# Altium PCB Protone.PcbDoc
Units mil, origin at the board's own origin, x right, y up, seen from the top; angles counter-clockwise.
Board outline 6000 x 4000 mil, 2 copper layers (Top Layer, Bottom Layer); 86 components, 68 nets, 317 pads, 0 vias.
Unrouted connection lines stored in the file: 154.
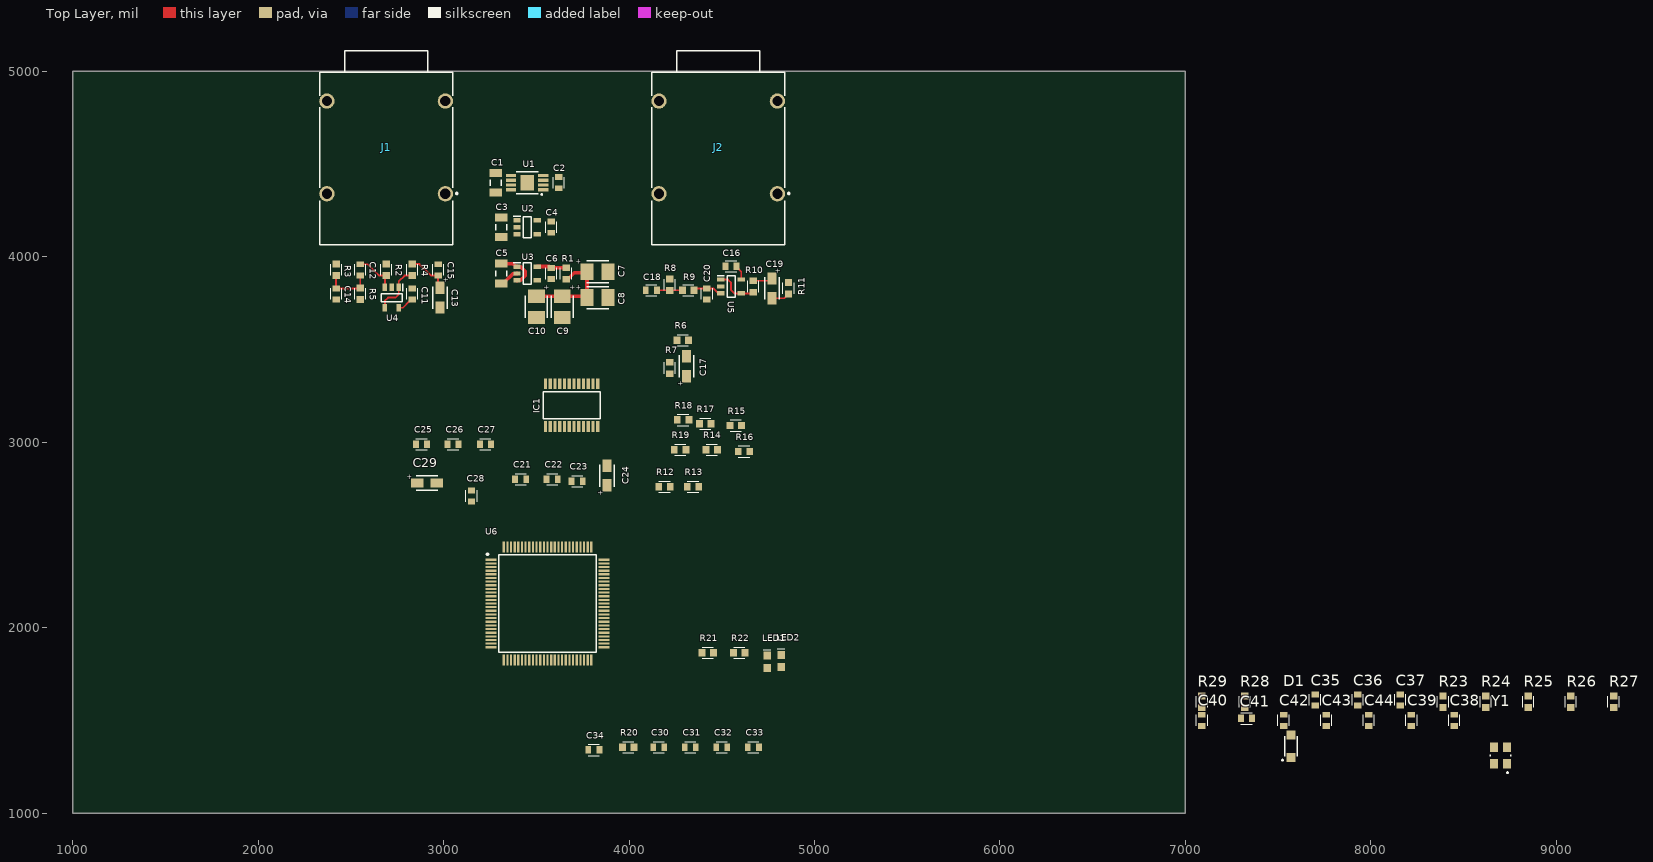
[diagram p0: Top Layer view]
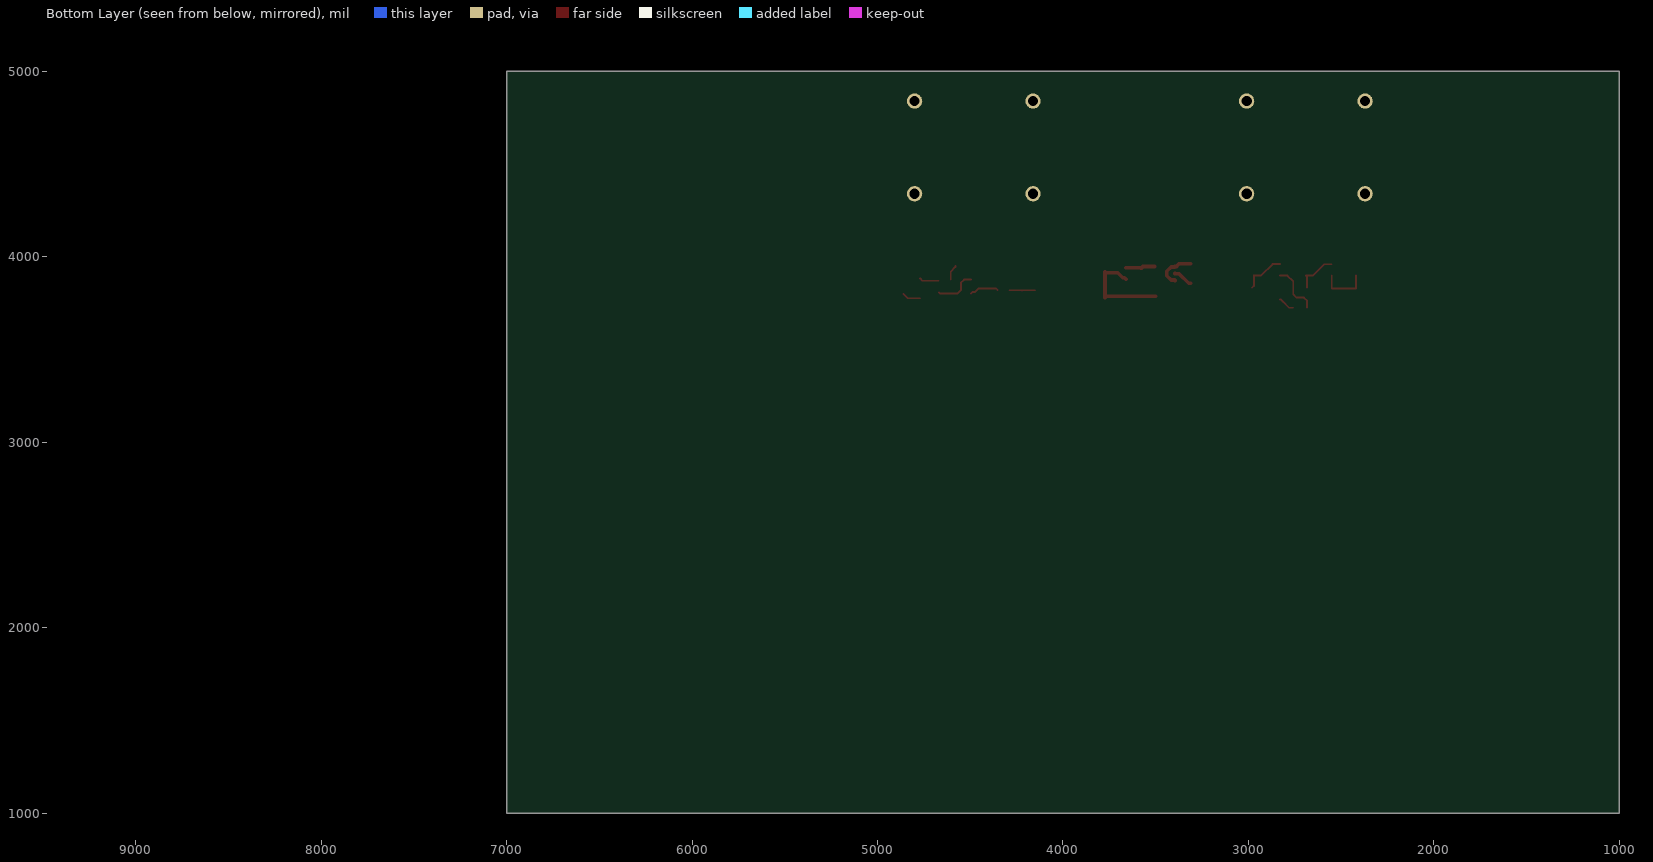
[diagram p1: Bottom Layer view, seen from below]

## Layer stack, top to bottom
Top Solder: solder mask 0.4, Solder Resist, Dk 3.5
Top Layer: signal copper 1.4
Dielectric 1: dielectric 12.6, FR-4, Dk 4.8
Bottom Layer: signal copper 1.4
Bottom Solder: solder mask 0.4, Solder Resist, Dk 3.5

## Board outline
1000,1000 7000,1000 7000,5000 1000,5000

## Design rules (kind name [scope] priority, off if disabled: settings)
Clearance [All] p1: gap=8 ignorepadtopadclearanceinfootprint=TRUE
MinimumSolderMaskSliver [All] p1: minsoldermaskwidth=6
PolygonConnect [All] p1: connectstyle=Relief reliefconductorwidth=10 reliefentries=4 polygonreliefangle="90 Angle" airgapwidth=10
RoutingVias [All] p1: holewidth=28 width=50 viastyle="Through Hole" minholewidth=28 minwidth=50 maxholewidth=28 maxwidth=50
SilkToSilkClearance [All] p1: silktosilkclearance=6
SilkToSolderMaskClearance [IsPad] p1: minsilkscreentomaskgap=6 clearancetoexposedcopper=TRUE
SolderMaskExpansion [All] p1: expansion=2 istentingtop=FALSE
Width [All] p1: maxlimit=20 minlimit=8 preferedwidth=10
27 further rules are at their usual default settings.

## Classes and differential pairs
component class "[1] Power Supply": C1 C2 C3 C4 C5 C6 C7 C8 C9 C10 R1 U1 U2 U3
component class "[4] MCU": C30 C31 C32 C33 C34 C35 C36 C37 C38 C39 C40 C41 C42 C43 C44 D1 LED1 LED2 R20 R21 R22 R23 R24 R25 R26 R27 R28 R29 U6 Y1
component class "[2] Analog Front-End": C11 C12 C13 C14 C15 C16 C17 C18 C19 C20 J1 J2 R2 R3 R4 R5 R6 R7 R8 R9 R10 R11 U4 U5
component class "[3] Audio Codec": C21 C22 C23 C24 C25 C26 C27 C28 C29 IC1 R12 R13 R14 R15 R16 R17 R18 R19

## Components (designator, comment, footprint, x,y, rotation, side; value= is the part's Value field where it differs from the comment)
C1 "2.2uF/50V" C1206 3280,4400 r90 top
C2 "1uF/16V" C0603 3620,4400 r90 top
C3 "2.2uF/50V" C1206 3310,4160 r270 top
C4 "1uF/16V" C0603 3580,4160 r270 top
C5 "2.2uF/50V" C1206 3310,3910 r270 top
C6 "1uF/16V" C0603 3580,3910 r270 top
C7 "47uF/10V" EIA1210 3830,3920 r0 top
C8 "47uF/10V" EIA1210 3830,3780 r0 top
C9 "47uF/10V" EIA1210 3640,3730 r270 top
C10 "47uF/10V" EIA1210 3500,3730 r270 top
C11 "0.1uF/50V C0G" C0603 2830,3800 r90 top
C12 "0.01uF/50V C0G" C0603 2550,3930 r90 top
C13 "10uF/10V" EIA1206 2980,3780 r270 top
C14 "220pF/50V C0G" C0603 2420,3800 r270 top
C15 "220pF/50V C0G" C0603 2970,3930 r90 top
C16 "0.1uF/50V C0G" C0603 4550,3950 r180 top
C17 "47uF/6.3V" EIA1206 4310,3410 r90 top
C18 "0.01uF/50V C0G" C0603 4120,3820 r0 top
C19 "10uF/10V" EIA1206 4770,3830 r270 top
C20 "0.001uF/50V" C0603 4420,3800 r90 top
C21 "2.2nF/50V" C0603 3415,2800 r0 top
C22 "0.1uF/16V" C0603 3585,2800 r0 top
C23 "0.1uF/16V" C0603 3720,2790 r0 top
C24 "47uF/6.3V" EIA1206 3880,2820 r90 top
C25 "2.2nF/50V" C0603 2880,2990 r0 top
C26 "0.1uF/16V" C0603 3050,2990 r0 top
C27 "0.1uF/16V" C0603 3225,2990 r0 top
C28 "0.1uF/16V" C0603 3150,2710 r90 top
C29 "47uF/6.3V" EIA1206 2910,2780 r0 top
C30 "10uF/10V" C0603 4160,1355 r0 top
C31 "10uF/10V" C0603 4330,1355 r0 top
C32 "220pF/50V" C0603 4500,1355 r0 top
C33 "0.1uF/50V" C0603 4670,1355 r0 top
C34 "0.1uF/50V" C0603 3809.88,1340 r0 top
C35 "0.1uF" C0603 7700,1610 r90 top
C36 "2.2uF/10V" C0603 7930,1610 r90 top
C37 "2.2uF/10V" C0603 8160,1610 r90 top
C38 "10pF" C0603 8450,1500 r90 top
C39 "10pF" C0603 8220,1500 r90 top
C40 "0.1uF/50V" C0603 7090,1500 r90 top
C41 "0.1uF/50V" C0603 7330,1510 r0 top
C42 "0.1uF/50V" C0603 7530,1500 r90 top
C43 "2.2uF/10V" C0603 7760,1500 r90 top
C44 "2.2uF/10V" C0603 7990,1500 r90 top
D1 "SMF4L33A" SOD-123FL 7570,1360 r90 top
IC1 "CS4270-CZZR" TSSOP-24 3690,3200 r90 top
J1 "NMJ4HCD2" NMJ4HCD2 2689.49,4995.71 r90 top
J2 "NMJ4HCD2" NMJ4HCD2 4480.51,4995.71 r90 top
LED1 "RED" "LED 0603" 4745,1815 r90 top
LED2 "RED" "LED 0603" 4820,1820 r90 top
R1 "10" R0603 3660,3910 r270 top
R2 "1M" R0603 2690,3930 r90 top
R3 "100" R0603 2420,3930 r270 top
R4 "1K" R0603 2830,3930 r90 top
R5 "1M" R0603 2550,3800 r90 top
R6 "1K" R0603 4290,3550 r0 top
R7 "1K" R0603 4220,3400 r90 top
R8 "1M" R0603 4220,3850 r90 top
R9 "1K" R0603 4320,3820 r0 top
R10 "100" R0603 4670,3840 r90 top
R11 "10K" R0603 4860,3830 r270 top
R12 "2.2K" R0603 4191.1,2760 r0 top
R13 "2.2K" R0603 4345,2760 r0 top
R14 "47" R0603 4445,2960 r0 top
R15 "47K" R0603 4575,3090 r0 top
R16 "10K" R0603 4620,2950 r0 top
R17 "10K" R0603 4410,3100 r0 top
R18 "10K" R0603 4291.1,3120 r0 top
R19 "10K" R0603 4275,2960 r0 top
R20 "10K" R0603 3995,1355 r0 top
R21 "1K" R0603 4425,1865 r0 top
R22 "1K" R0603 4595,1865 r0 top
R23 "10K" R0603 8390,1600 r90 top
R24 "10K" R0603 8620,1600 r90 top
R25 "10K" R0603 8850,1600 r90 top
R26 "10K" R0603 9080,1600 r90 top
R27 "10K" R0603 9310,1600 r90 top
R28 "47" R0603 7320,1600 r90 top
R29 "1M" R0603 7090,1600 r90 top
U1 "TLV76733DGNR" HVSSOP-8 3450,4400 r180 top
U2 "NCP718BSN180T1G" SOT23-5 3450,4160 r0 top
U3 "NCP718BSN500T1G" SOT23-5 3450,3910 r0 top
U4 "TLV9161IDBVR" SOT23-5 2720,3780 r270 top
U5 "TLV9161IDBVR" SOT23-5 4550,3840 r0 top
U6 "STM32H723VGT6" QFP-100 3560,2130 r0 top
Y1 "16MHz 12pF" "XTAL 3.2 x 2.5 mm" 8700,1310 r90 top

## Footprints (in the part's own frame and the unit in brackets; to place one, negate y for a bottom-side part, rotate by r counter-clockwise, add the part's x,y. Pads: shape width x height; smd on the part's side, far side on the other; paste and mask are expansions set on the pad)
C0603 [mm]
  rect 0.8x1.02 smd: 1(-0.759,0) 2(0.759,0)
  silkscreen extent -0.76,-0.76 0.76,0.76, body extent -0.8,-0.4 0.8,0.4, height 0.81
C1206 [mm] "Chip Capacitor, Body 3.2x1.6mm, IPC High Density"
  rect 1.1x1.7 smd: 1(-1.35,0) 2(1.35,0)
  silkscreen extent -0.4,-0.75 0.4,0.75, body extent -1.7,-0.9 1.7,0.9, height 1.3
EIA1206 [mm]
  rect 1.7x1.25 smd: 1(-1.35,0) 2(1.35,0)
  silkscreen extent -1.5,-1 1.5,1, body extent -1.6,-0.8 1.6,0.8, height 1.8
EIA1210 [mm]
  rect 1.8x2.3 smd: 1(-1.45,0) 2(1.45,0)
  silkscreen extent -1.5,-1.5 1.5,1.51, body extent -1.75,-1.43 1.75,1.43, height 2.1
HVSSOP-8 [mm]
  rect 1.4x0.45 smd: 1(-2.2,0.975) 2(-2.2,0.325) 3(-2.2,-0.325) 4(-2.2,-0.975) 5(2.2,-0.975) 6(2.2,-0.325) 7(2.2,0.325) 8(2.2,0.975)
  rect 1.846x2.15 smd: 9(0,0)
  silkscreen extent -2.1,-1.5 1.5,1.7, body extent -2.45,-1.5 2.45,1.5, height 1.1
"LED 0603" [mm]
  rect 1.1x1 smd: 1(-0.85,0) 2(0.85,0)
  silkscreen extent 1.65,-0.51 1.65,0.51, body extent -0.8,-0.4 0.8,0.4, height 0.4
NMJ4HCD2 [mm]
  round 2.1 hole 1.4: 1(-16.655,-8.115) 2(-3.955,-8.115) 3(-3.955,8.115) 4(-16.655,8.115)
  silkscreen extent -23.61,-9.84 2.92,9.1, body extent -23.52,-9.14 8.28,9.06, height 15.95
QFP-100 [mm]
  rect 1.475x0.3 smd: 1(-7.738,6) 2(-7.738,5.5) 3(-7.738,5) 4(-7.738,4.5) 5(-7.738,4) 6(-7.738,3.5) 7(-7.738,3) 8(-7.738,2.5) 9(-7.738,2) 10(-7.738,1.5) 11(-7.738,1) 12(-7.738,0.5) 13(-7.738,0) 14(-7.738,-0.5) 15(-7.738,-1) 16(-7.738,-1.5) 17(-7.738,-2) 18(-7.738,-2.5) 19(-7.738,-3) 20(-7.738,-3.5) 21(-7.738,-4) 22(-7.738,-4.5) 23(-7.738,-5) 24(-7.738,-5.5) 25(-7.738,-6) 51(7.738,-6) 52(7.738,-5.5) 53(7.738,-5) 54(7.738,-4.5) 55(7.738,-4) 56(7.738,-3.5) 57(7.738,-3) 58(7.738,-2.5) 59(7.738,-2) 60(7.738,-1.5) 61(7.738,-1) 62(7.738,-0.5) 63(7.738,0) 64(7.738,0.5) 65(7.738,1) 66(7.738,1.5) 67(7.738,2) 68(7.738,2.5) 69(7.738,3) 70(7.738,3.5) 71(7.738,4) 72(7.738,4.5) 73(7.738,5) 74(7.738,5.5) 75(7.738,6)
  rect 0.3x1.475 smd: 26(-6,-7.738) 27(-5.5,-7.738) 28(-5,-7.738) 29(-4.5,-7.738) 30(-4,-7.738) 31(-3.5,-7.738) 32(-3,-7.738) 33(-2.5,-7.738) 34(-2,-7.738) 35(-1.5,-7.738) 36(-1,-7.738) 37(-0.5,-7.738) 38(0,-7.738) 39(0.5,-7.738) 40(1,-7.738) 41(1.5,-7.738) 42(2,-7.738) 43(2.5,-7.738) 44(3,-7.738) 45(3.5,-7.738) 46(4,-7.738) 47(4.5,-7.738) 48(5,-7.738) 49(5.5,-7.738) 50(6,-7.738) 76(6,7.738) 77(5.5,7.738) 78(5,7.738) 79(4.5,7.738) 80(4,7.738) 81(3.5,7.738) 82(3,7.738) 83(2.5,7.738) 84(2,7.738) 85(1.5,7.738) 86(1,7.738) 87(0.5,7.738) 88(0,7.738) 89(-0.5,7.738) 90(-1,7.738) 91(-1.5,7.738) 92(-2,7.738) 93(-2.5,7.738) 94(-3,7.738) 95(-3.5,7.738) 96(-4,7.738) 97(-4.5,7.738) 98(-5,7.738) 99(-5.5,7.738) 100(-6,7.738)
  silkscreen extent -8.35,-6.65 6.65,6.87, body extent -8,-8 8,8, height 1.6
R0603 [mm]
  rect 0.94x1.02 smd: 1(-0.79,0) 2(0.79,0)
  silkscreen extent -0.76,-0.76 0.76,0.76, body extent -0.8,-0.4 0.8,0.4, height 0.51
SOD-123FL [mm]
  rect 1.2x1.22 smd: A(1.55,0) C(-1.55,0)
  silkscreen extent -2,-0.87 1.35,1.24, body extent -1.83,-0.87 1.83,0.87, height 1.1
SOT23-5 [mm]
  rect 1x0.6 smd: 1(-1.4,0.95) 2(-1.4,0) 3(-1.4,-0.95) 4(1.4,-0.95) 5(1.4,0.95)
  silkscreen extent -1.9,-1.45 0.55,1.5, body extent -1.4,-1.45 1.4,1.45, height 1.2
TSSOP-24 [mm]
  rect 1.475x0.45 smd: 1(-2.938,3.575) 2(-2.938,2.925) 3(-2.938,2.275) 4(-2.938,1.625) 5(-2.938,0.975) 6(-2.938,0.325) 7(-2.938,-0.325) 8(-2.938,-0.975) 9(-2.938,-1.625) 10(-2.938,-2.275) 11(-2.938,-2.925) 12(-2.938,-3.575) 13(2.938,-3.575) 14(2.938,-2.925) 15(2.938,-2.275) 16(2.938,-1.625) 17(2.938,-0.975) 18(2.938,-0.325) 19(2.938,0.325) 20(2.938,0.975) 21(2.938,1.625) 22(2.938,2.275) 23(2.938,2.925) 24(2.938,3.575)
  silkscreen extent -1.85,-3.9 1.85,3.9, body extent -3.2,-3.9 3.2,3.9, height 1.2
"XTAL 3.2 x 2.5 mm" [mm]
  rect 1.3x1.1 smd: 1(-1.15,-0.9) 2(1.15,-0.9) 3(1.15,0.9) 4(-1.15,0.9)
  silkscreen extent -2.45,-1.4 0.13,1.4, body extent -1.6,-1.25 1.6,1.25, height 0.8

## Part data
C1 C3 C5: library part "C1206 2.2uF/50V", "MLCC 2.2uF 50V X7R 10% 1206", Manufacturer=KEMET, Manufacturer Part Number=C1206C225J5RECAUTO, Supplier Part Number 1=80-C1206C225J5RECAUT, Pricing 1="1=0.26000, 10=0.11800, 50=0.11800, 100=0.10100, 1000=0.10100, 10000=0.10100 (USD)", RoHS=Yes, Stock 1=1416, Supplier 1=Mouser
C2 C4 C6: library part "C0603 1uF/16V X5R", "MLCC 1uF 16V X5R 10% SMD 0603 85C Paper T/R", Capacitance=1uF, Case Code (Imperial)=0603, Case Code (Metric)=1608, Dielectric=X5R, Manufacturer=Yageo, Manufacturer Part Number=CC0603KRX5R7BB105, Max Operating Temperature=85°C, Min Operating Temperature=-55°C, Package Quantity=4000, Resistor Type=Ceramic, Supplier Part Number 1=603-CC603KRX5R7BB105, Tolerance=10%, Voltage Rating=16V, Case/Package=0603, Category="Ceramic Capacitors", Construction=Flat, Depth=0.8mm, Dissipation Factor=7%, Halogen Free="Halogen Free", Height=0.8mm, Lead Free="Lead Free", Length=1.6mm, Mount="Surface Mount", Number of Pins=2, Packaging="Tape and Reel", Pricing 1="1=0.17000, 10=0.09100, 50=0.09100, 100=0.04100, 1000=0.03400, 10000=0.02100 (USD)", Radiation Hardening=No, REACH SVHC=Unknown, RoHS=Yes, RoHS Compliant=Yes, Series=CC, Stock 1=726921, Supplier 1=Mouser, Termination=SMD/SMT, Thickness=0.035inch, Voltage Rating (DC)=16V, Width=0.8mm
C7 C8 C9 C10: library part "TANT 47UF/10V", "Tantalum Capacitors - Solid SMD 10V 47uF 10%", Capacitance=47uF, Case Code (Imperial)=1411, Case Code (Metric)=3528, Case/Package=1210, Dielectric Material=Tantalum, ESR (Equivalent Series Resistance)=1R, Leakage Current=4.7uA, Manufacturer="Kyocera AVX", Manufacturer Part Number=TAJB476K010RNJ, Max Operating Temperature=125°C, Min Operating Temperature=-55°C, Package Quantity=2000, Supplier Part Number 1=581-TAJB476K010, Tolerance=10%, Voltage=10V, Category="Tantalum Capacitors", Construction=Flat, Depth=2.8mm, Dissipation Factor=8%, Features="General Purpose", Height=1.9mm, Lead Free="Lead Free", Lead Pitch=1.4mm, Length=3.5mm, Mount="Surface Mount,PCB", Number of Pins=2, Packaging="Tape and Reel", Polarity=Polar, Pricing 1="1=0.46, 10=0.234, 50=0.234, 100=0.201, 1000=0.127, 10000=0.103 (USD)", Radiation Hardening=No, Reach SVHC Compliant=No, RoHS=Yes, RoHS Compliant=Yes, Series=TAJ, Stock 1=71514, Supplier 1=Mouser, Termination=SMD/SMT, Voltage Rating=10V, Voltage Rating (DC)=10V, Width=2.8mm
C11 C16: library part "C0603 0.1uF/50V", "MLCC 0.1uF 50V C0G 10% 0603", Capacitance=100nF, Case Code (Imperial)=0603, Case Code (Metric)=1608, Dielectric=X5R, Dielectric Material=Ceramic, Manufacturer=TDK, Manufacturer Part Number=C1608X5R1H104K080AA, Max Operating Temperature=85°C, Min Operating Temperature=-55°C, Package Quantity=1, Supplier Part Number 1=810-C1608X5R1H104K, Tolerance=10%, Voltage Rating=50V, Case/Package=0603, Category="Ceramic Capacitors", Depth=0.8mm, Height=0.8mm, Lead Free="Lead Free", Length=1.6mm, Mount="Surface Mount", Number of Pins=2, Packaging="Tape and Reel", Pricing 1="1=0.12000, 10=0.04500, 100=0.03700, 500=0.02600, 1000=0.02100, 4000=0.01800 (USD)", Radiation Hardening=No, REACH SVHC="No SVHC", Resistor Type=Ceramic, RoHS=Yes, Stock 1=520600, Supplier 1=Mouser, Supplier 2=Mouser, Supplier Part Number 2=187-CL10B104KB8NNNC, Termination=SMD/SMT, Thickness=0.035inch, Voltage Rating (DC)=50V, Weight=7.1E-05oz, Width=0.031inch
C12 C18: library part "C0603 0.01uF/50V C0G", "MLCC 0.01uF 50V C0G 5% 0603", Capacitance=10nF, Case Code (Imperial)=0603, Case Code (Metric)=1608, Dielectric=C0G, Manufacturer=Murata, Manufacturer Part Number=GRM1885C1H103JA01J, Max Operating Temperature=125°C, Min Operating Temperature=-55°C, Package Quantity=10000, Supplier Part Number 1=81-GRM1885C1H103JA1J, Temperature Coefficient=30ppm/°C, Tolerance=5%, Voltage Rating=50V, Case/Package=0603, Category="Ceramic Capacitors", Height=0.8mm, Length=1.6mm, Material=4241ConductorMaterial, Mount="Surface Mount", Packaging="Tape and Reel", Pricing 1="1=0.13, 10=0.052, 50=0.052, 100=0.03, 1000=0.025, 10000=0.018 (USD)", RoHS=Yes, RoHS Compliant=Yes, Series=GRM, Stock 1=193832, Supplier 1=Mouser, Termination=SMD/SMT, Voltage Rating (DC)=50V, Weight=0.000222oz, Width=0.8mm
C13 C19: library part "TANT 10UF/10V", "Tantalum Capacitors - Solid SMD 10V 10uF 10%", Capacitance=10uF, Case Code (Imperial)=1206, Case Code (Metric)=3216, Dielectric Material=Tantalum, ESR (Equivalent Series Resistance)=4R, Leakage Current=1uA, Manufacturer=KEMET, Manufacturer Part Number=T491A106K010AT, Max Operating Temperature=125°C, Min Operating Temperature=-55°C, Package Quantity=2000, Ripple Current=137mA, Supplier Part Number 1=80-T491A106K010, Tolerance=10%, Voltage=10V, Case/Package=1206, Category="Tantalum Capacitors", Depth=1.6mm, Dissipation Factor=6%, Features="General Purpose", Height=1.6mm, Height - Seated (Max)=0.071inch, Lead Free="Lead Free", Length=3.2mm, Life (Hours)=2000Hour, Mount="Surface Mount,PCB", Packaging="Tape and Reel", Polarity=Polar, REACH SVHC="No SVHC", RoHS=Yes, Stock 1=88800, Supplier 1=Mouser, Supplier 2=LCSC, Supplier Part Number 2=C110052, Termination=SMD/SMT, Voltage Rating=10V, Voltage Rating (DC)=10V, Width=0.063inch
C14 C15: library part "C0603 220pF/50V C0G", "MLCC 220pF 50V C0G 5% 0603", Capacitance=220pF, Case Code (Imperial)=0603, Case Code (Metric)=1608, Dielectric=C0G, Dielectric Material=Ceramic, Manufacturer=KEMET, Manufacturer Part Number=C0603C221J5GACTU, Max Operating Temperature=125°C, Min Operating Temperature=-55°C, Package Quantity=1, Supplier Part Number 1=80-C0603C221J5G, Temperature Coefficient=30ppm/°C, Tolerance=5%, Voltage=50V, Case/Package=0603, Category="Ceramic Capacitors", Construction=Flat, Depth=0.8mm, Dissipation Factor=0.1%, Height=0.8mm, Lead Free="Lead Free", Lead Pitch=0.7mm, Length=1.6mm, Material=4241ConductorMaterial, Mount="Surface Mount", Number of Pins=2, Packaging="Tape and Reel", Pricing 1="1=0.1, 10=0.027, 50=0.027, 100=0.016, 1000=0.011, 10000=0.007 (USD)", Radiation Hardening=No, Reach SVHC Compliant=No, RoHS=Yes, RoHS Compliant=Yes, Series=C, Stock 1=174318, Supplier 1=Mouser, Termination=SMD/SMT, Thickness=0.034inch, Voltage Rating=50V, Voltage Rating (AC)=50V, Voltage Rating (DC)=50V, Width=0.8mm
C17 C24 C29: library part "TANT 47UF/6.3V", "Tantalum Capacitors - Solid SMD 6.3V 47uF 10%", Capacitance=47uF, Case/Package=Radial, Manufacturer="Kyocera AVX", Manufacturer Part Number=TAJA476K006SNJV, Supplier Part Number 1=581-TAJA476K006SNJV, Tolerance=10%, Voltage Rating (DC)=6.3V, Category="Tantalum Capacitors", Lead Free="Lead Free", Pricing 1="1=0,57000, 10=0,39900, 50=0,39900, 100=0,20200, 1000=0,15200, 10000=0,12500 (USD)", RoHS=Yes, RoHS Compliant=Yes, Stock 1=97469, Supplier 1=Mouser
C20: library part "C0603 0.001uF/50V", "MLCC 0.001uF 50V X5R 10% 0603", Capacitance=1nF, Case/Package=0603, Dielectric=X7R, Manufacturer=Samsung, Manufacturer Part Number=CL10B102KB8NNNL, Max Operating Temperature=125°C, Min Operating Temperature=-55°C, Package Quantity=15000, Supplier Part Number 1=187-CL10B102KB8NNNL, Tolerance=10%, Voltage Rating=50V, Category="Ceramic Capacitors", Construction=Flat, Depth=0.8mm, Height=0.8mm, Lead Free="Lead Free", Length=1.6mm, Mount="Surface Mount", Packaging="Tape and Reel", Pricing 1="1=0.10000, 10=0.03500, 50=0.03500, 100=0.01600, 1000=0.00900, 10000=0.00600 (USD)", Radiation Hardening=No, RoHS=Yes, RoHS Compliant=Yes, Series=CL, Stock 1=55616, Supplier 1=Mouser, Thickness=0.035inch, Voltage Rating (DC)=50V, Width=0.031inch
C21 C25: library part "C0603 2.2nF/50V", "MLCC 2.2nF 10V X5R 10% 0603", Capacitance=2.2nF, Case Code (Imperial)=0603, Case Code (Metric)=1608, Dielectric=X7R, Manufacturer=Samsung, Manufacturer Part Number=CL10B222KB8NFNC, Max Operating Temperature=125°C, Min Operating Temperature=-55°C, Package Quantity=1, Supplier Part Number 1=187-CL10B222KB8NFNC, Tolerance=10%, Voltage Rating=50V, Case/Package=0603, Category="Ceramic Capacitors", Construction=Flat, Depth=0.8mm, Height=0.8mm, Length=0.063inch, Mount="Surface Mount", Packaging="Tape and Reel", Pricing 1="1=0.10000, 10=0.03800, 50=0.03800, 100=0.01700, 1000=0.00900, 10000=0.00600 (USD)", Radiation Hardening=No, RoHS=Yes, RoHS Compliant=Yes, Series=CL, Stock 1=114857, Supplier 1=Mouser, Thickness=0.035inch, Width=0.031inch
C22 C23 C26 C27 C28: library part "C0603 0.1uF/16V", "MLCC 0.1UF, 16V, X5R, 10%, 0603.", Capacitance=100nF, Case Code (Imperial)=0603, Case Code (Metric)=1608, Dielectric=X5R, Manufacturer="Kyocera AVX", Manufacturer Part Number=0603YD104KAT2A, Max Operating Temperature=85°C, Min Operating Temperature=-55°C, Package Quantity=4000, Supplier Part Number 1=581-0603YD104KAT2A, Tolerance=10%, Voltage Rating=16V, Case/Package=0603, Category="Ceramic Capacitors", ComponentLink1Description=https://datasheet.ciiva.com/11504/cx5r-11504040.pdf?src-supplier=Avnet, ComponentLink1URL=https://datasheet.ciiva.com/11504/cx5r-11504040.pdf?src-supplier=Avnet, ComponentLink2Description=https://datasheet.ciiva.com/208/cx5r-208121.pdf?src-supplier=Digi-Key, ComponentLink2URL=https://datasheet.ciiva.com/208/cx5r-208121.pdf?src-supplier=Digi-Key, Depth=0.81mm, Height=0.9mm, Lead Free="Lead Free", Length=1.6mm, Mount="Surface Mount", Number of Pins=2, Packaging="Tape and Reel", Pricing 1="1=0.26000, 10=0.11400, 50=0.11400, 100=0.09700, 1000=0.05900, 10000=0.04800 (USD)", RoHS=Yes, Stock 1=3315, Supplier 1=Mouser, Termination=SMD/SMT, Thickness=0.035inch, Voltage Rating (DC)=16V, Width=0.81mm
C30 C31: library part "C0603 10uF/10V", "MLCC 10uF 10V X5R 20% 0603", Capacitance=10uF, Case Code (Imperial)=0603, Case Code (Metric)=1608, Manufacturer=KEMET, Manufacturer Part Number=C0603C106M8PAC7867, Max Operating Temperature=85°C, Min Operating Temperature=-55°C, Supplier Part Number 1=80-C0603C106M8PACTU, Tolerance=20%, Voltage Rating=10V, Case/Package=0603, Category="Ceramic Capacitors", Mount="Surface Mount", Packaging="Cut Tape", Pricing 1="1=0.46000, 10=0.24500, 50=0.24500, 100=0.21300, 1000=0.13400, 10000=0.10600 (USD)", RoHS=Yes, RoHS Compliant=Yes, Stock 1=19357, Supplier 1=Mouser, Supplier 2=Digi-Key, Supplier Part Number 2=399-14945-6-ND
C32: library part "C0603 220pF/50V", "MLCC 220pF 50V X7R 10% 0603", Capacitance=220pF, Case/Package=0603, Dielectric=X7R, Dielectric Material=Ceramic, Manufacturer=KEMET, Manufacturer Part Number=C0603C221K5RACTU, Max Operating Temperature=125°C, Min Operating Temperature=-55°C, Supplier Part Number 1=80-C0603C221K5R, Tolerance=10%, Voltage=50V, Category="Ceramic Capacitors", Depth=0.8mm, Height=0.8mm, Length=1.6mm, Mount="Surface Mount", Packaging="Tape and Reel", Pricing 1="1=0.10000, 10=0.03100, 100=0.02100, 500=0.01800, 1000=0.01400, 4000=0.01100 (USD)", Radiation Hardening=No, RoHS=Yes, Stock 1=91306, Supplier 1=Mouser, Termination=SMD/SMT, Voltage Rating (DC)=50V
C33 C34 C35 C40 C41 C42: library part "C0603 0.1uF/50V", "MLCC 0.1uF 50V X5R 10% 0603", Capacitance=100nF, Case Code (Imperial)=0603, Case Code (Metric)=1608, Dielectric=X5R, Dielectric Material=Ceramic, Manufacturer=TDK, Manufacturer Part Number=C1608X5R1H104K080AA, Max Operating Temperature=85°C, Min Operating Temperature=-55°C, Package Quantity=1, Supplier Part Number 1=810-C1608X5R1H104K, Tolerance=10%, Voltage Rating=50V, Case/Package=0603, Category="Ceramic Capacitors", Depth=0.8mm, Height=0.8mm, Lead Free="Lead Free", Length=1.6mm, Mount="Surface Mount", Number of Pins=2, Packaging="Tape and Reel", Pricing 1="1=0.12000, 10=0.04500, 100=0.03700, 500=0.02600, 1000=0.02100, 4000=0.01800 (USD)", Radiation Hardening=No, REACH SVHC="No SVHC", Resistor Type=Ceramic, RoHS=Yes, Stock 1=520600, Supplier 1=Mouser, Supplier 2=Mouser, Supplier Part Number 2=187-CL10B104KB8NNNC, Termination=SMD/SMT, Thickness=0.035inch, Voltage Rating (DC)=50V, Weight=7.1E-05oz, Width=0.031inch
C36 C37 C43 C44: library part "C0603 2.2uF/10V", "MLCC 2.2uF 10V X5R 10% 0603", Capacitance=2.2uF, Case Code (Imperial)=0603, Case Code (Metric)=1608, Dielectric=X5R, Manufacturer=Samsung, Manufacturer Part Number=CL10A225KP8NNNC, Max Operating Temperature=85°C, Min Operating Temperature=-55°C, Package Quantity=1, Supplier Part Number 1=187-CL10A225KP8NNNC, Tolerance=10%, Voltage=10V, Case/Package=0603, Category="Ceramic Capacitors", Depth=0.8mm, Height=0.8mm, Lead Free="Lead Free", Length=1.6mm, Material=Ceramic, Mount="Surface Mount", Packaging="Tape and Reel", Pricing 1="1=0.10000, 10=0.06100, 100=0.02700, 500=0.01900, 1000=0.01500, 2500=0.01100 (USD)", Radiation Hardening=No, RoHS=Yes, Stock 1=763370, Supplier 1=Mouser, Thickness=0.035inch, Voltage Rating=10V, Voltage Rating (DC)=10V, Width=0.031inch
C38 C39: library part "C0603 10pF/50V", "MLCC 10pF 50V X7R 10% 0603", Case/Package=0603, Dielectric=X7R, Dielectric Material=Ceramic, Manufacturer=KEMET, Manufacturer Part Number=C0603C100K5RACTU, Supplier Part Number 1=80-C0603C100K5R, Tolerance=10%, Voltage Rating (DC)=50V, Capacitance=10pF, Category="Ceramic Capacitors", Pricing 1="1=0.24000, 10=0.11000, 50=0.11000, 100=0.09400, 1000=0.05800, 10000=0.04100 (USD)", RoHS=No, Stock 1=10694, Supplier 1=Mouser, Supplier 2=Mouser, Supplier Part Number 2=581-06035C100KAT2A
D1: library part "ESD Diode SMF4L33A", "TVS DIODE, 2KW, 33V, UNIDIR, SOD-123FL", Clamping Voltage=53.3V, Manufacturer=Littelfuse, Max Operating Temperature=150°C, Min Breakdown Voltage=36.7V, Min Operating Temperature=-55°C, Peak Pulse Current=7.5A, Peak Pulse Power=400W, Power Line Protection=No, Resistor Type=Zener, Reverse Standoff Voltage=33V, Supplier Part Number 1=576-SMF4L33A, Category="TVS Diodes", Manufacturer Part Number=SMF4L33A, Mount="Surface Mount", Number of Unidirectional Channels=1, Packaging="Tape and Reel", Pricing 1="1=0,46000, 10=0,30000, 50=0,30000, 100=0,16700, 1000=0,12500, 10000=0,10100 (USD)", RoHS=Yes, RoHS Compliant=Yes, Stock 1=5344, Supplier 1=Mouser
IC1: "Audio Codec 2ADC / 2DAC 24-Bit 24-Pin TSSOP T/R (Alt: CS4270-CZZR)", Case/Package=TSSOP, Manufacturer="Cirrus Logic", Max Operating Temperature=70°C, Min Operating Temperature=-10°C, Package Quantity=4000, Supplier Part Number 1=777-CS4270-CZZR, Category=CODECs, Contact Plating=Tin,Matte, Interface=I2C,SPI,Serial, Manufacturer Part Number=CS4270-CZZR, Mount="Surface Mount", Number Of A/D Converters=2, Number of D/A Converters=2, Number of Pins=24, Packaging="Tape and Reel", Pricing 1="1=7.04, 10=6.36, 50=6.06, 100=5.27, 1000=4.4, 10000=4.4 (USD)", Resolution=24b, RoHS=Yes, RoHS Compliant=Yes, Sampling Rate=216KS/s, Series=-, Stock 1=20885, Supplier 1=Mouser
J1 J2: library part "TS Audio Jack 6.3mm", "Phone Connectors 2C MONO 2-SPST NC", Color=Black, Manufacturer=Neutrik, Max Current Rating=3A, Max Operating Temperature=70°C, Min Operating Temperature=-25°C, Package Quantity=200, Supplier Part Number 1=550-12202, Voltage Rating=50V, Category="Audio / Video Connectors", ComponentLink1Description=https://datasheet.ciiva.com/16148/210-199761-16148179.pdf?src-supplier=Onlinecomponents.com, ComponentLink1URL=https://datasheet.ciiva.com/16148/210-199761-16148179.pdf?src-supplier=Onlinecomponents.com, Contact Material=Brass, Contact Plating=Silver, Gender=Female, Housing Material=Polyamide, Manufacturer Part Number=NMJ4HCD2, Mount="Through Hole", Number of Contacts=2, Number of Pins=4, Number of Ports=1, Number of Terminals/Pins=4, Orientation=Horizontal, Pricing 1="1=1,51000, 10=1,39000, 50=1,36000, 100=1,18000, 1000=1,11000, 10000=1,10000 (USD)", RoHS=Yes, RoHS Compliant=Yes, Series=M, Stock 1=39770, Supplier 1=Mouser, Termination="Through Hole", Weight=0.246918oz
LED1 LED2: library part "LED 0603 RED", "Red 625nm LED Indication - Discrete 2V 0603", Case Code (Imperial)=0603, Case Code (Metric)=1608, Color=Red, Forward Voltage=2V, Manufacturer="Wurth Electronics", Manufacturer Part Number=150060RS55040, Supplier Part Number 1=710-150060RS55040, Test Current=20mA, Case/Package=0603, Category=LEDs, Dominant Wavelength=624nm, Height=0.5mm, Length=1.6mm, Lens Size=0.8mm, Lens Style=Flat, Lens Transparency=Diffused, Luminous Intensity=90mcd, Mount="Surface Mount", Packaging="Tape and Reel", Pricing 1="1=0.18000, 10=0.16200, 100=0.14700, 500=0.13200, 1000=0.11700, 2000=0.11700 (USD)", RoHS=No, Stock 1=8586, Supplier 1=Mouser, Viewing Angle=140°, Width=0.8mm
R1: library part "R0603 10", "RES 0603 10 OHM 0.5% 1/10W", Case Code (Imperial)=0603, Case Code (Metric)=1608, Manufacturer=Yageo, Manufacturer Part Number=RT0603DRE0710RL, Max Power Dissipation=100mW, Resistance=10R, Resistor Type="Thin Film", Supplier Part Number 1=603-RT0603DRE0710RL, Tolerance=0.5%, Voltage Rating (DC)=50V, Case/Package=0603, Category="Chip SMD Resistors", Number of Terminations=2, RoHS=Yes, Supplier 1=Mouser
R2 R5 R8 R29: library part "R0603 1M", "RES SMD 1M OHM 1% 1/10W 0603", Case Code (Imperial)=0603, Case Code (Metric)=1608, Manufacturer=Yageo, Manufacturer Part Number=RC0603FR-071ML, Max Operating Temperature=155°C, Min Operating Temperature=-55°C, Package Quantity=5000, Power Rating=100mW, Resistance=1MR, Resistor Type="Thick Film", Supplier Part Number 1=603-RC0603FR-071ML, Temperature Coefficient=100ppm/°C, Tolerance=1%, Voltage Rating=75V, Voltage Rating (DC)=50V, Application(s)="HIGH RELIABILITY", Case/Package=0603, Category="Chip SMD Resistors", Depth=0.8mm, Height=0.45mm, Lead Free="Lead Free", Length=1.6mm, Military Standard=Not, Number of Pins=2, Packaging="Cut Tape", Pricing 1="1=0.10000, 10=0.01800, 50=0.01800, 100=0.00700, 1000=0.00400, 10000=0.00200 (USD)", REACH SVHC="No SVHC", RoHS=Yes, RoHS Compliant=Yes, Series=RC, Stock 1=1321822, Supplier 1=Mouser, Technology="THICK FILM", Termination=SMD/SMT, Type="General Purpose", Weight=0.000847oz, Width=0.8mm
R3 R10: library part "R0603 100", "RES 0603 100 OHM 1% 1/10W", Case Code (Imperial)=0603, Case Code (Metric)=1608, Manufacturer=Yageo, Manufacturer Part Number=RC0603FR-07100RL, Max Operating Temperature=155°C, Max Power Dissipation=100mW, Min Operating Temperature=-55°C, Resistance=100R, Resistor Type="Thick Film", Supplier Part Number 1=603-RC0603FR-07100RL, Temperature Coefficient=100ppm/°C, Tolerance=1%, Voltage Rating=50V, Case/Package=0603, Category="Chip SMD Resistors", Construction=Rectangular, Contact Plating=Tin,Matte, Depth=0.8mm, Features="Moisture Resistant,Automotive AEC-Q200", Height=0.022inch, Lead Free="Lead Free", Length=1.6mm, Military Standard=Not, Number of Terminations=2, Packaging="Tape and Reel", Power Rating=100mW, Pricing 1="1=0.10000, 10=0.02200, 50=0.02200, 100=0.00800, 1000=0.00600, 10000=0.00400 (USD)", Radiation Hardening=No, RoHS=Yes, RoHS Compliant=Yes, Series=AC, Size Code=0603, Stock 1=62434, Supplier 1=Mouser, Termination=SMD/SMT, Weight=7.1E-05oz, Width=0.031inch
R4 R6 R7 R9: library part "R0603 1K", "Res Thick Film 0603 1K Ohm 1% 1/10W ±50ppm/°C Molded SMD Paper T/R", Case/Package=0603, Manufacturer=Yageo, Manufacturer Part Number=RE0603FRE071KL, Max Operating Temperature=155°C, Max Power Dissipation=100mW, Min Operating Temperature=-55°C, Resistance=1kR, Resistor Type="Thick Film", Supplier Part Number 1=603-RE0603FRE071KL, Temperature Coefficient=50ppm/°C, Tolerance=1%, Category="Chip SMD Resistors", ComponentLink1Description=http://www.yageo.com/NewPortal/yageodocoutput?fileName=/pdf/R-Chip/PYu-RE_105_RoHS_L_4.pdf&src-supplier=Digi-Key, ComponentLink1URL=http://www.yageo.com/NewPortal/yageodocoutput?fileName=/pdf/R-Chip/PYu-RE_105_RoHS_L_4.pdf&src-supplier=Digi-Key, Features="Moisture Resistant", Height=0.022inch, Length=0.063inch, Number of Terminations=2, Packaging="Tape and Reel", Pricing 1="1=0.11000, 10=0.03800, 50=0.03800, 100=0.01700, 1000=0.00800, 10000=0.00500 (USD)", RoHS=Yes, RoHS Compliant=Yes, Stock 1=21464, Supplier 1=Mouser, Width=0.032inch
R11 R16 R17 R18 R19: library part "R0603 10K", "RES 0603 10K OHM 1% 1/10W", Case Code (Imperial)=0603, Case Code (Metric)=1608, Manufacturer=Yageo, Manufacturer Part Number=RC0603FR-0710KP, Max Operating Temperature=155°C, Max Power Dissipation=100mW, Min Operating Temperature=-55°C, Resistance=10kR, Resistor Type="Thick Film", Supplier Part Number 1=603-RC0603FR-0710KP, Temperature Coefficient=150ppm/°C, Tolerance=1%, Case/Package=0603, Category="Chip SMD Resistors", Features="Moisture Resistant", Height=0.022inch, Length=0.063inch, Number of Terminations=2, Packaging="Tape and Reel", Pricing 1="1=0.18000, 10=0.04200, 50=0.04200, 100=0.01400, 1000=0.01000, 10000=0.00600 (USD)", RoHS=Yes, RoHS Compliant=Yes, Stock 1=6316, Supplier 1=Mouser, Width=0.031inch
R12 R13: library part "R0603 2.2K", "RES 0603 2.2K OHM 1% 1/10W", Case Code (Imperial)=0603, Case Code (Metric)=1608, Manufacturer=Yageo, Manufacturer Part Number=RC0603FR-072K2L, Max Operating Temperature=155°C, Max Power Dissipation=100mW, Min Operating Temperature=-55°C, Package Quantity=1, Resistance=2.2kR, Resistance Tolerance=1%, Resistor Type="Thick Film", Supplier Part Number 1=603-RC0603FR-072K2L, Temperature Coefficient=100ppm/°C, Voltage Rating=50V, Case/Package=0603, Category="Chip SMD Resistors", Construction=Rectangular, Depth=0.8mm, Features="Moisture Resistant", Height=0.022inch, Lead Free="Lead Free", Length=1.6mm, Military Standard=Not, Number of Terminations=2, Packaging="Tape and Reel", Power Rating=100mW, Pricing 1="1=0.100000, 10=0.018000, 50=0.018000, 100=0.006000, 1000=0.005000, 10000=0.003000 (USD)", REACH SVHC="No SVHC", RoHS=Yes, RoHS Compliant=Yes, Series=RC, Size Code=0603, Stock 1=372094, Supplier 1=Mouser, Termination=SMD/SMT, Tolerance=1%, Width=0.031inch
R14 R28: library part "R0603 47", "RES 0603 47 1% 1/10W", Case Code (Imperial)=0603, Case Code (Metric)=1608, Manufacturer=Yageo, Manufacturer Part Number=RC0603FR-0747RL, Max Operating Temperature=155°C, Max Power Dissipation=100mW, Min Operating Temperature=-55°C, Package Quantity=1, Resistance=47R, Resistor Type="Thick Film", Supplier Part Number 1=603-RC0603FR-0747RL, Temperature Coefficient=100ppm/°C, Tolerance=1%, Voltage Rating=75V, Voltage Rating (DC)=50V, Case/Package=0603, Category="Chip SMD Resistors", Depth=0.8mm, Features="Moisture Resistant", Height=0.45mm, Lead Free="Lead Free", Length=1.6mm, Military Standard=Not, Number of Pins=2, Number of Terminations=2, Packaging="Tape and Reel", Power Rating=100mW, REACH SVHC=Unknown, RoHS=Yes, Stock 1=267107, Supplier 1=Mouser, Termination=SMD/SMT, Weight=7.1E-05oz, Width=0.8mm
R15: library part "R0603 47K", "RES 0603 47K 1% 1/10W", Case Code (Imperial)=0603, Case Code (Metric)=1608, Manufacturer=Yageo, Manufacturer Part Number=RC0603FR-0747KL, Max Operating Temperature=155°C, Max Power Dissipation=100mW, Min Operating Temperature=-55°C, Package Quantity=1, Resistance=47kR, Resistance Tolerance=1%, Resistor Type="Thick Film", Supplier Part Number 1=603-RC0603FR-0747KL, Temperature Coefficient=100ppm/°C, Voltage Rating=50V, Case/Package=0603, Category="Chip SMD Resistors", Construction=Rectangular, Depth=0.8mm, Features="Moisture Resistant", Height=0.022inch, Lead Free="Lead Free", Length=1.6mm, Military Standard=Not, Number of Pins=2, Number of Terminations=2, Packaging="Tape and Reel", Power Rating=100mW, Pricing 1="1=0.10000, 10=0.02400, 50=0.02400, 100=0.01000, 1000=0.00400, 10000=0.00200 (USD)", REACH SVHC=Unknown, RoHS=Yes, RoHS Compliant=Yes, Series=RC, Size Code=0603, Stock 1=158656, Supplier 1=Mouser, Technology="THICK FILM", Termination=SMD/SMT, Tolerance=1%, Voltage Rating (DC)=50V, Width=0.031inch
R20 R23 R24 R25 R26 R27: library part "R0603 10K", "RES 0603 10K OHM 1% 1/10W", Case Code (Imperial)=0603, Case Code (Metric)=1608, Manufacturer=Yageo, Manufacturer Part Number=RC0603FR-1310KL, Max Operating Temperature=155°C, Min Operating Temperature=-55°C, Power Rating=100mW, Resistance=10kR, Resistance Tolerance=1%, Resistor Type="Thick Film", Supplier Part Number 1=603-RC0603FR-1310KL, Temperature Coefficient=100ppm/°C, Voltage Rating=50V, Case/Package=0603, Category="Chip SMD Resistors", ComponentLink1Description=https://datasheet.ciiva.com/7983/443971-7983673.pdf?src-supplier=Element14, ComponentLink1URL=https://datasheet.ciiva.com/7983/443971-7983673.pdf?src-supplier=Element14, ComponentLink2Description=https://datasheet.ciiva.com/16850/pyu-rc0603-51-rohs-l-4-16850349.pdf?src-supplier=Future+Electronics, ComponentLink2URL=https://datasheet.ciiva.com/16850/pyu-rc0603-51-rohs-l-4-16850349.pdf?src-supplier=Future+Electronics, Construction=Rectangular, Depth=0.8mm, Lead Free="Lead Free", Length=1.6mm, Military Standard=Not, Number of Pins=2, Packaging="Tape and Reel", Pricing 1="1=0.10000, 10=0.01800, 50=0.01800, 100=0.00600, 1000=0.00500, 2500=0.00400, 10000=0.00400 (USD)", REACH SVHC="No SVHC", RoHS=Yes, RoHS Compliant=Yes, Series=RC, Size Code=0603, Stock 1=50990, Supplier 1=Mouser, Termination=SMD/SMT, Tolerance=1%, Voltage Rating (DC)=50V
R21 R22: library part "R0603 1K", "RES 0603 1K OHM 1% 1/10W", Case Code (Imperial)=0603, Case Code (Metric)=1608, Manufacturer=Yageo, Manufacturer Part Number=RC0603FR-071KL, Max Operating Temperature=155°C, Max Power Dissipation=100mW, Min Operating Temperature=-55°C, Resistance=1kR, Resistance Tolerance=1%, Resistor Type="Thick Film", Supplier Part Number 1=603-RC0603FR-071KL, Temperature Coefficient=100ppm/°C, Voltage Rating=50V, Case/Package=0603, Category="Chip SMD Resistors", Construction=Rectangular, Contact Plating=Tin,Matte, Depth=0.8mm, Features="Moisture Resistant", Height=0.45mm, Lead Free="Lead Free", Length=1.6mm, Military Standard=Not, Number of Terminations=2, Packaging="Tape and Reel", Power Rating=100mW, Pricing 1="1=0.10000, 10=0.02100, 50=0.02100, 100=0.00700, 1000=0.00400, 10000=0.00200 (USD)", Radiation Hardening=No, REACH SVHC="No SVHC", RoHS=Yes, RoHS Compliant=Yes, Series=RC, Size Code=0603, Stock 1=1697496, Supplier 1=Mouser, Technology="THICK FILM", Termination=SMD/SMT, Tolerance=1%
U1: "Fixed-output, 1-A, 16-V, positive-voltage low-dropout (LDO) linear regulator 8-HVSSOP -40 to 125", Manufacturer="Texas Instruments", Supplier Part Number 1=595-TLV76733DGNR, Category="Integrated Circuits (ICs)", Manufacturer Part Number=TLV76733DGNR, Pricing 1="1=0.88, 10=0.784, 50=0.744, 100=0.611, 1000=0.399, 10000=0.33 (USD)", RoHS=Yes, Stock 1=27181, Supplier 1=Mouser
U2: "LDO Regulator, 300 mA, Wide Vin, Ultra-Low Iq Fixed 1.8V, Non-Active Discharge, TSOT23-5", Manufacturer="ON Semiconductor", Supplier Part Number 1=863-NCP718BSN180T1G, Category="Voltage Regulators - Linear", Manufacturer Part Number=NCP718BSN180T1G, Pricing 1="1=0.66, 10=0.528, 50=0.528, 100=0.332, 1000=0.234, 10000=0.192 (USD)", RoHS=Yes, RoHS Compliant=Yes, Stock 1=4463, Supplier 1=Mouser
U3: "LDO Regulator, 300 mA, Wide Vin, Ultra-Low Iq Fixed 5.0V, Non-Active Discharge, TSOT23-5", Manufacturer="ON Semiconductor", Supplier Part Number 1=863-NCP718BSN500T1G, Category="Voltage Regulators - Linear", Manufacturer Part Number=NCP718BSN500T1G, Pricing 1="1=0.61, 10=0.534, 50=0.534, 100=0.37, 1000=0.22, 10000=0.182 (USD)", RoHS=Yes, RoHS Compliant=Yes, Stock 1=32274, Supplier 1=Mouser
U4 U5: "Single 10-MHz, 16-V rail-to-rail input/output, very low noise, high slew rate op amp 5-SOT-23 -40 to 125", Manufacturer="Texas Instruments", Supplier Part Number 1=595-TLV9161IDBVR, Category="Amplifiers - Op Amps, Buffer, Instrumentation", Manufacturer Part Number=TLV9161IDBVR, Pricing 1="1=0.94, 10=0.839, 50=0.839, 100=0.654, 1000=0.435, 10000=0.375 (USD)", RoHS=No, Stock 1=20844, Supplier 1=Mouser
U6: "MCU 32-bit ARM Cortex M7 RISC 1MB Flash 1.8V/2.5V/3.3V 100-Pin LQFP Tray", Manufacturer=STMicroelectronics, Supplier Part Number 1=511-STM32H723VGT6, Category=Microcontrollers, Manufacturer Part Number=STM32H723VGT6, Pricing 1="1=12.88, 10=11.84, 50=10.07, 100=10, 1000=8.84, 10000=8.84 (USD)", RoHS=Yes, Stock 1=2663, Supplier 1=Mouser
Y1: library part "XTAL 16MHz 12pF", "Crystal 16MHz ±50ppm (Tol) ±100ppm (Stability) 12pF FUND 80Ohm 4-Pin SMD T/R", Case/Package=SMD/SMT, ESR (Equivalent Series Resistance)=80R, Frequency=16MHz, Frequency Stability=100ppm, Frequency Tolerance=50ppm, Load Capacitance=12pF, Manufacturer="Kyocera AVX", Manufacturer Part Number=CX3225SB16000H0PSTC1, Max Operating Temperature=125°C, Min Operating Temperature=-40°C, Ratings=AEC-Q200, Supplier Part Number 1=581-CX3225SB16H0PST, Category=Crystals, Height=0.024inch, Length=0.126inch, Mount="Surface Mount", Packaging="Tape and Reel", Pricing 1="1=0.69000, 10=0.57500, 50=0.57500, 100=0.46000, 1000=0.36800, 10000=0.34400 (USD)", RoHS=Yes, RoHS Compliant=Yes, Stock 1=2997, Supplier 1=Mouser, Width=0.098inch

## Nets (pads, with @x,y where several pads share a name; then routed paths per layer and width w, separated by ;. In a path a pad name is that pad's centre, name@x,y a point inside that pad or via, vN(x,y) a via of type N, cw(c..) or ccw(c..) an arc to the next point about the centre after c; other vN are vias at no path point)
1.8V: C4.1 U2.5
3.3V: C2.1 C25.1 C26.2 C27.2 C30.1 C31.1 C32.1 C33.1 C34.1 C37.1 C40.1 C41.1 C42.1 IC1.5 IC1.8 LED1.1 LED2.1 R12.2 R13.2 R23.2 R24.2 R25.2 R26.2 R27.2 U1.1 U1.2
3.3V_SD: C35.1 C36.1 D1.C
5V: C6.1 R1.1 U3.5 | length 158.5
  Top Layer w20: U3.5 3568.15,3947.4 3575.67,3939.88 C6.1 3580.61,3940.49 3659.39,3940.49 R1.1
5VA: C7.1 C8.1 C9.1 C10.1 C11.1 C16.1 C21.1 C22.2 IC1.19 R1.2 R6.1 U4.5 U5.5 | length 720.2
  Top Layer w10: U4.5 2780.43,3724.88 2814.92,3759.37 2825.67,3770.12 C11.1 ; C16.1 4579.88,3945.67 4605.12,3920.43 U5.5
  Top Layer w20: C10.1 3765.83,3787.09 C8.1 3772.91,3787.09 C7.1 3767.09,3914.17 3704.17,3914.17 3677.4,3887.4 3668.5,3887.4 R1.2
ADC1: U6.15
ADC2: U6.16
ADC3: U6.22
ADC4: U6.23
ADC5: U6.24
ADC6: U6.25
AUDIO_IN: J1.4 R3.1
AUDIO_OUT: C19.2 J2.4 R11.2 | length 99.1
  Top Layer w10: C19.2 4836.38,3776.85 4858.43,3798.9 R11.2
BOOT: R20.2 U6.94
CARD_DETECT: R29.2 U6.82
CODEC_FILT: C23.2 C24.1 IC1.18
CODEC_IN_L: C13.2 IC1.22
CODEC_IN_R: IC1.23
CODEC_NRST: IC1.14 R19.2
CODEC_OUT_L: C18.1 IC1.15
CODEC_OUT_R: IC1.16
CODEC_VQ: C28.2 C29.1 IC1.17
GND: C1.2 C2.2 C3.2 C4.2 C5.2 C6.2 C7.2 C8.2 C9.2 C10.2 C11.2 C14.2 C15.2 C16.2 C17.2 C20.1 C21.2 C22.1 C23.1 C24.2 C25.2 C26.1 C27.1 C28.1 C29.2 C30.2 C31.2 C32.2 C33.2 C34.2 C35.2 C36.2 C37.2 C38.1 C39.1 C40.2 C41.2 C42.2 C43.2 C44.2 D1.A IC1.6 IC1.20 J1.1 J1.2 J1.3 J2.1 J2.2 J2.3 R5.1 R7.2 R11.1 R15.1 R16.1 R17.1 R18.1 R19.1 R20.1 R29.1 U1.4 U1.6 U1.9 U2.2 U3.2 U4.2 U5.2 U6.10 U6.19 U6.26 U6.49 U6.74 Y1.2 Y1.4 | length 106.9
  Top Layer w20: C5.2 3321.81,3856.85 3373.15,3908.19 3393.07,3908.19 U3.2
I2C2_SCL: IC1.10 R12.1 U6.45
I2C2_SDA: IC1.9 R13.1 U6.46
I2S_BCLK: IC1.4 U6.29
I2S_MCLK: IC1.3 U6.32
I2S_SDIN: IC1.1 U6.30
I2S_SDOUT: IC1.7 R14.2 R15.2 U6.31
I2S_WCLK: IC1.2 U6.28
IN1: U6.87
IN2: U6.88
IN_BUFF+_L: C12.2 R2.1 U4.3 | length 232.1
  Top Layer w10: C12.2 2590.12,3959.88 2650,3900 2688.9,3900 R2.1 2682.6,3891.5 U4.3
IN_BUFF-_L: R4.1 U4.1 U4.4 | length 282.6
  Top Layer w10: U4.4 2682.6,3762.6 2700,3780 2740,3780 2757.4,3797.4 U4.1 2757.4,3867.4 2788.9,3898.9 R4.1
IN_FILT_L: C13.1 C15.1 R4.2 | length 236.4
  Top Layer w10: R4.2 2868.9,3961.1 2929.88,3900.12 C15.1 2970,3843.15 C13.1
IN_RF_L: C12.1 C14.1 R3.2 R5.2 | length 268.5
  Top Layer w10: R3.2 C14.1 2548.78,3829.88 R5.2 C12.1
LED1: R21.1
LED2: R22.1
LED_B: U6.86
LED_G: U6.85
LED_R: U6.84
NetIC1_11: IC1.11 R16.2
NetIC1_12: IC1.12 R17.2
NetIC1_13: IC1.13 R18.2
NetLED1_2: LED1.2 R21.2
NetLED2_2: LED2.2 R22.2
NRST: U6.14
OSC_IN: C39.2 U6.8 Y1.3
OSC_OUT: C38.2 U6.9 Y1.1
OUT_BIAS_L: C18.2 R8.1 R9.1 | length 139.9
  Top Layer w10: C18.2 4218.9,3820 R8.1 4221.1,3820 R9.1
OUT_BUFF+_L: C20.2 R9.2 U5.3 | length 159.2
  Top Layer w10: R9.2 4360.98,3829.88 C20.2 4455.08,3829.88 4475.55,3809.41 4488.07,3809.41 U5.3
OUT_BUFF-_L: R10.1 U5.1 U5.4 | length 232.1
  Top Layer w10: U5.1 4532.6,3877.4 4550,3860 4550,3820 4567.4,3802.6 U5.4 4663.7,3802.6 R10.1
OUT_RC_L: C19.1 R10.2 | length 105
  Top Layer w10: R10.2 4757.95,3871.1 C19.1
SD: R14.1
SD_CLK: R28.1
SDMMC1_CK: R28.2 U6.80
SDMMC1_CMD: R23.1 U6.83
SDMMC1_D0: R24.1 U6.52
SDMMC1_D1: R25.1 U6.66
SDMMC1_D2: R26.1 U6.78
SDMMC1_D3: R27.1 U6.79
USB_HS_DM: U6.70
USB_HS_DP: U6.71
USB_HS_VBUS: U6.68
VCA: C1.1 C3.1 C5.1 U1.5 U1.8 U2.1 U2.3 U3.1 U3.3 | length 227.8
  Top Layer w20: C5.1 3373.46,3963.15 3385.2,3951.42 3385.2,3949.21 3387.01,3947.4 U3.1 3396.69,3945.59 3416.24,3945.59 3440,3921.83 3440,3898.17 3416.24,3874.41 3396.69,3874.41 U3.3
VCAP1: C44.1 U6.48
VCAP2: C43.1 U6.73
VREF: C17.1 R2.2 R6.2 R7.1 R8.2
pads on no net: IC1.21 IC1.24 U1.3 U1.7 U2.4 U3.4 U6.1 U6.2 U6.3 U6.4 U6.5 U6.6 U6.7 U6.11 U6.12 U6.13 U6.17 U6.18 U6.20 U6.21 U6.27 U6.33 U6.34 U6.35 U6.36 U6.37 U6.38 U6.39 U6.40 U6.41 U6.42 U6.43 U6.44 U6.47 U6.50 U6.51 U6.53 U6.54 U6.55 U6.56 U6.57 U6.58 U6.59 U6.60 U6.61 U6.62 U6.63 U6.64 U6.65 U6.67 U6.69 U6.72 U6.75 U6.76 U6.77 U6.81 U6.89 U6.90 U6.91 U6.92 U6.93 U6.95 U6.96 U6.97 U6.98 U6.99 U6.100

## Text inside footprints (layer, text, board x,y; h text height)
C7: Top Assembly "+" at 3711.34,3961.34 h25; Top Overlay "+" at 3711.34,3961.34 h25
C8: Top Assembly "+" at 3711.34,3821.34 h25; Top Overlay "+" at 3711.34,3821.34 h25
C9: Top Assembly "+" at 3681.34,3848.66 h25 r270; Top Overlay "+" at 3681.34,3848.66 h25 r270
C10: Top Assembly "+" at 3541.34,3848.66 h25 r270; Top Overlay "+" at 3541.34,3848.66 h25 r270
C13: Top Assembly "+" at 3001.34,3888.66 h25 r270; Top Overlay "+" at 3001.34,3888.66 h25 r270
C17: Top Assembly "+" at 4288.66,3301.34 h25 r90; Top Overlay "+" at 4288.66,3301.34 h25 r90
C19: Top Assembly "+" at 4791.34,3938.66 h25 r270; Top Overlay "+" at 4791.34,3938.66 h25 r270
C24: Top Assembly "+" at 3858.66,2711.34 h25 r90; Top Overlay "+" at 3858.66,2711.34 h25 r90
C29: Top Assembly "+" at 2801.34,2801.34 h25; Top Overlay "+" at 2801.34,2801.34 h25